# Altium PCB PCB2.PcbDoc
Units mm, origin at the board's own origin, x right, y up, seen from the top; angles counter-clockwise.
Board outline 152.4 x 101.6 mm, 2 copper layers (Top Layer, Bottom Layer); 79 components, 54 nets, 208 pads, 0 vias.
Unrouted connection lines stored in the file: 95.
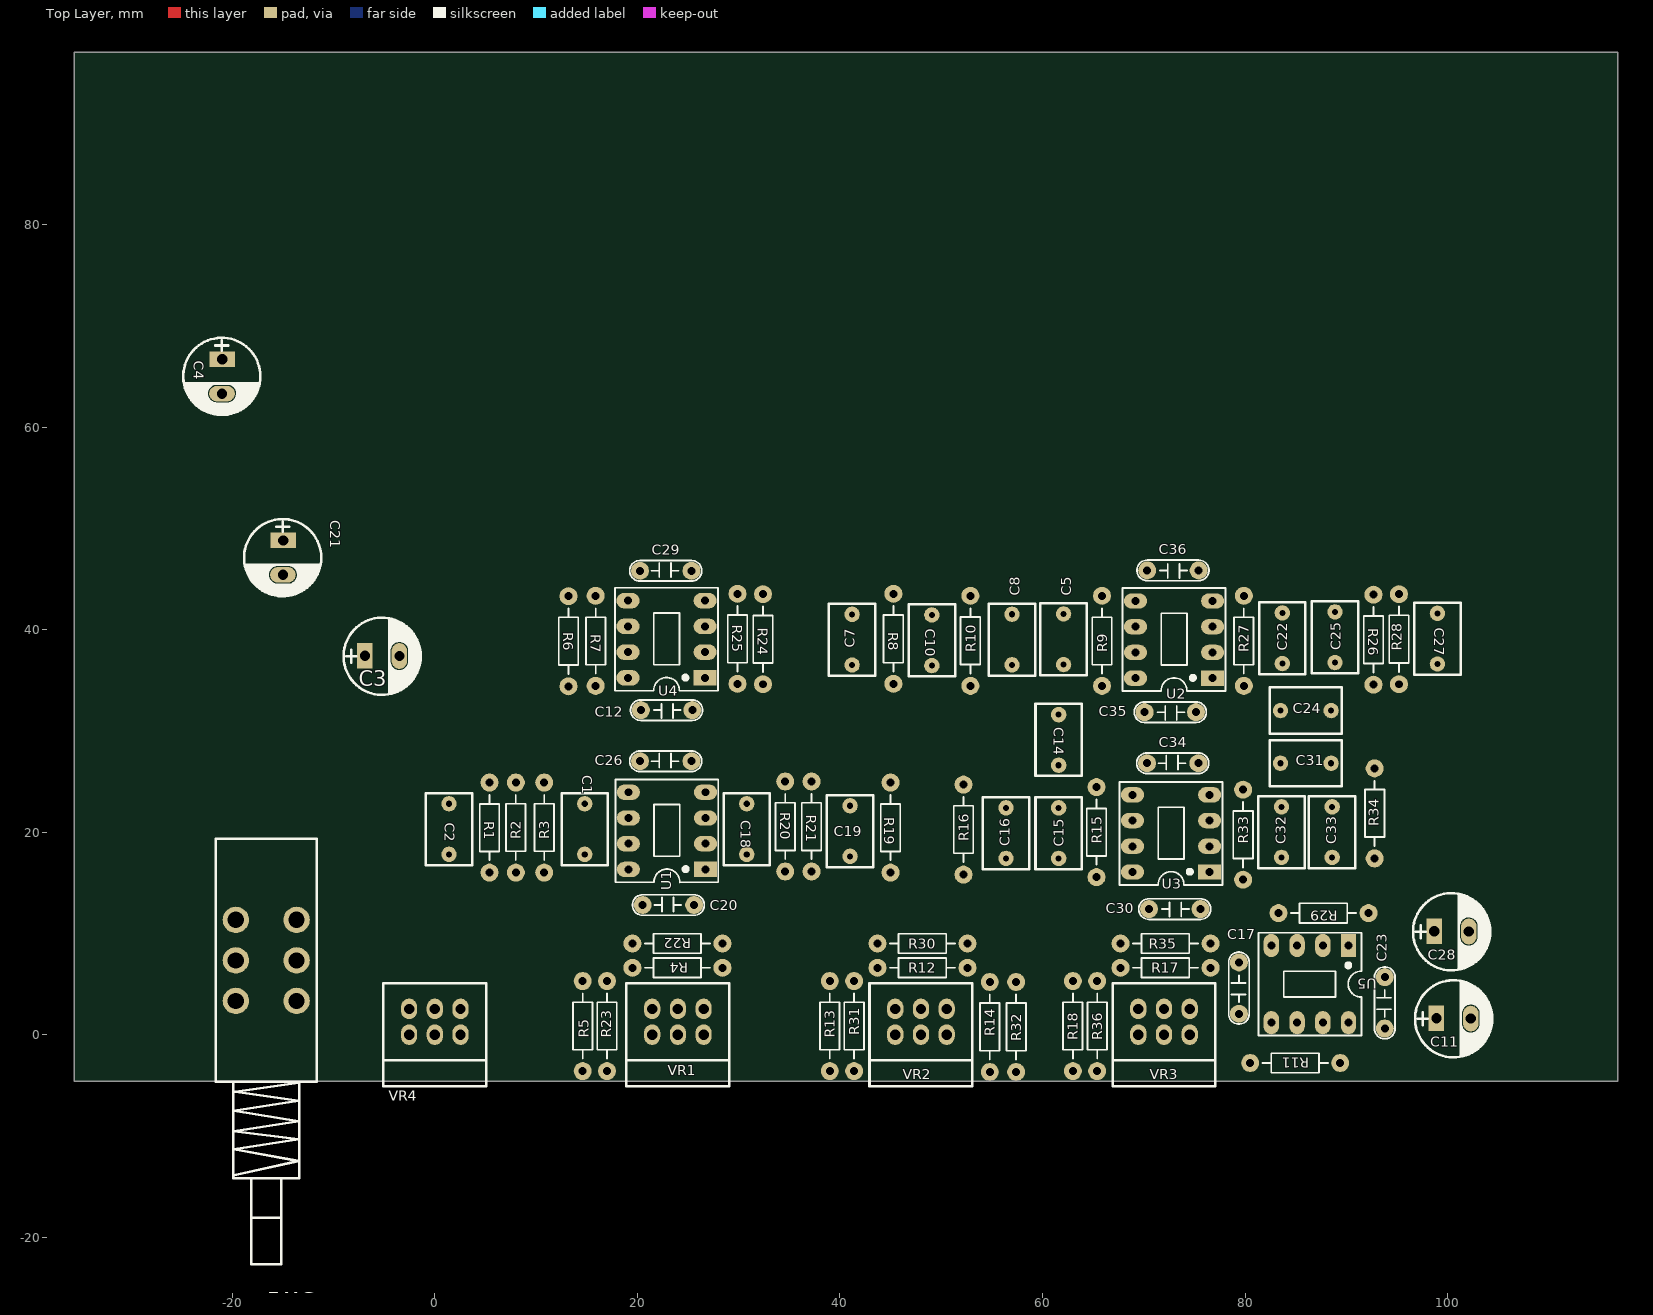
[diagram p0: Top Layer view]
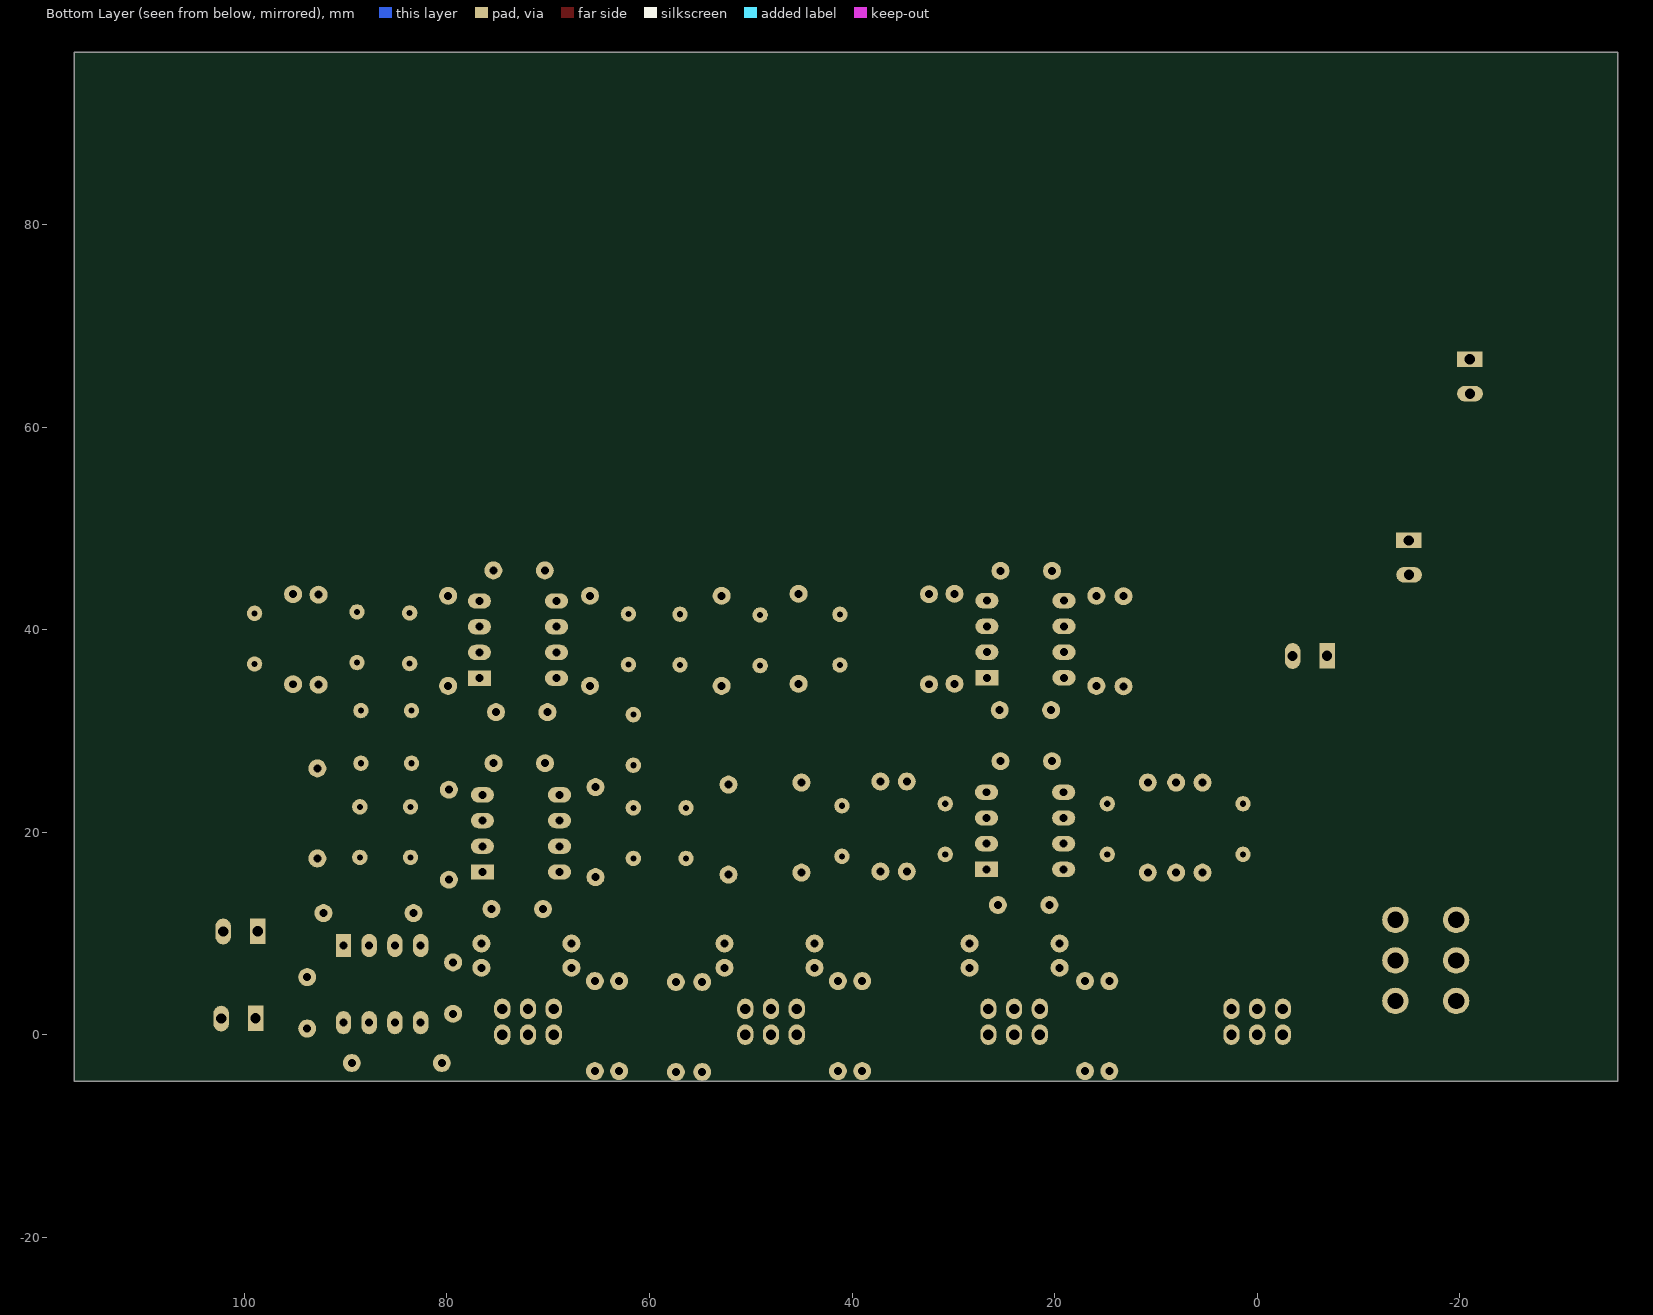
[diagram p1: Bottom Layer view, seen from below]

## Layer stack, top to bottom
Top Solder: solder mask 0.0102, Solder Resist, Dk 3.5
Top Layer: signal copper 0.0356
Dielectric 1: dielectric 0.32, FR-4, Dk 4.8
Bottom Layer: signal copper 0.0356
Bottom Solder: solder mask 0.0102, Solder Resist, Dk 3.5

## Board outline
-35.6,-4.6 116.8,-4.6 116.8,97 -35.6,97

## Design rules (kind name [scope] priority, off if disabled: settings)
Clearance [All] p1: gap=0.254
PolygonConnect [All] p1: connectstyle=Relief reliefconductorwidth=0.254 reliefentries=4 polygonreliefangle="90 Angle" airgapwidth=0.254
RoutingVias [All] p1: holewidth=0.711 width=1.27 viastyle="Through Hole" minholewidth=0.711 minwidth=1.27 maxholewidth=0.711 maxwidth=1.27
SolderMaskExpansion [All] p1: expansion=0.102
Width [All] p1: maxlimit=0.254 minlimit=0.254 preferedwidth=0.254
30 further rules are at their usual default settings.

## Components (designator, comment, footprint, x,y, rotation, side; value= is the part's Value field where it differs from the comment)
C1 "562" WIMA-FKP-2-1nF 14.8,20.301 r270 top
C2 "223" WIMA-FKP-2-1nF 1.4,20.299 r270 top
C3 "1uF" CP1/3.0 -5.2,37.4 r0 top
C4 "1uF" CP1/3.0 -21,65 r270 top
C5 "102" WIMA-FKP-2-1nF 62.082,39.042 r90 top
C7 "103" WIMA-FKP-2-1nF 41.2,39 r90 top
C8 "152" WIMA-FKP-2-1nF 56.99,39.01 r90 top
C10 "152" WIMA-FKP-2-1nF 49.082,38.941 r270 top
C11 "10uF" CP1/3.0 100.6,1.6 r0 top
C12 "104" TU_GOM(104-->105pF) 22.882,32.042 r180 top
C14 "471" WIMA-FKP-2-1nF 61.6,29.099 r90 top
C15 "471" WIMA-FKP-2-1nF 61.6,19.901 r90 top
C16 "471" WIMA-FKP-2-1nF 56.4,19.901 r90 top
C17 "104" TU_GOM(104-->105pF) 79.4,4.6 r90 top
C18 "562" WIMA-FKP-2-1nF 30.8,20.301 r270 top
C19 "222" WIMA-FKP-2-1nF 41,20.101 r90 top
C20 "104" TU_GOM(104-->105pF) 23.06,12.8 r0 top
C21 "1uF" CP1/3.0 -14.987,47.102 r270 top
C22 "102" WIMA-FKP-2-1nF 83.682,39.141 r90 top
C23 "104" TU_GOM(104-->105pF) 93.8,3.14 r90 top
C24 "103" WIMA-FKP-2-1nF 86,32 r0 top
C25 "152" WIMA-FKP-2-1nF 88.882,39.242 r90 top
C26 "104" TU_GOM(104-->105pF) 22.8,27 r0 top
C27 "152" WIMA-FKP-2-1nF 99,39.099 r90 top
C28 "10uF" CP1/3.0 100.4,10.2 r0 top
C29 "104" TU_GOM(104-->105pF) 22.8,45.8 r0 top
C30 "104" TU_GOM(104-->105pF) 73.06,12.4 r180 top
C31 "471" WIMA-FKP-2-1nF 86,26.8 r180 top
C32 "471" WIMA-FKP-2-1nF 83.6,20 r90 top
C33 "471" WIMA-FKP-2-1nF 88.6,20 r90 top
C34 "104" TU_GOM(104-->105pF) 72.86,26.8 r0 top
C35 "104" TU_GOM(104-->105pF) 72.622,31.842 r180 top
C36 "104" TU_GOM(104-->105pF) 72.882,45.842 r180 top
R1 "47K" "TRO_VACH_ 1/4W" 5.4,24.89 r270 top
R2 "47K" "TRO_VACH_ 1/4W" 8,16 r90 top
R3 "47K" "TRO_VACH_ 1/4W" 10.8,16 r90 top
R4 "56K" "TRO_VACH_ 1/4W" 28.4,6.6 r180 top
R5 "100" "TRO_VACH_ 1/4W" 14.6,-3.6 r90 top
R6 "47K" "TRO_VACH_ 1/4W" 13.2,34.4 r90 top
R7 "47K" "TRO_VACH_ 1/4W" 15.882,43.332 r270 top
R8 "47K" "TRO_VACH_ 1/4W" 45.282,43.532 r270 top
R9 "220K" "TRO_VACH_ 1/4W" 65.882,43.332 r270 top
R10 "47K" "TRO_VACH_ 1/4W" 52.882,34.442 r90 top
R11 "560K" "TRO_VACH_ 1/4W" 89.4,-2.8 r180 top
R12 "47K" "TRO_VACH_ 1/4W" 52.6,6.6 r180 top
R13 "100" "TRO_VACH_ 1/4W" 39,-3.6 r90 top
R14 "22K" "TRO_VACH_ 1/4W" 54.8,-3.69 r90 top
R15 "220K" "TRO_VACH_ 1/4W" 65.332,24.442 r270 top
R16 "56K" "TRO_VACH_ 1/4W" 52.2,15.8 r90 top
R17 "56K" "TRO_VACH_ 1/4W" 76.6,6.6 r180 top
R18 "100" "TRO_VACH_ 1/4W" 63,-3.6 r90 top
R19 "47K" "TRO_VACH_ 1/4W" 45,24.89 r270 top
R20 "47K" "TRO_VACH_ 1/4W" 34.6,25 r270 top
R21 "47K" "TRO_VACH_ 1/4W" 37.2,25 r270 top
R22 "56K" "TRO_VACH_ 1/4W" 28.4,9 r180 top
R23 "100" "TRO_VACH_ 1/4W" 17,-3.6 r90 top
R24 "47K" "TRO_VACH_ 1/4W" 32.4,43.49 r270 top
R25 "47K" "TRO_VACH_ 1/4W" 29.882,43.532 r270 top
R26 "47K" "TRO_VACH_ 1/4W" 92.682,43.442 r270 top
R27 "220K" "TRO_VACH_ 1/4W" 79.882,43.332 r270 top
R28 "47K" "TRO_VACH_ 1/4W" 95.2,34.6 r90 top
R29 "560K" "TRO_VACH_ 1/4W" 92.2,12 r180 top
R30 "47K" "TRO_VACH_ 1/4W" 52.6,9 r180 top
R31 "100" "TRO_VACH_ 1/4W" 41.4,-3.6 r90 top
R32 "22K" "TRO_VACH_ 1/4W" 57.4,-3.69 r90 top
R33 "220K" "TRO_VACH_ 1/4W" 79.81,24.188 r270 top
R34 "56K" "TRO_VACH_ 1/4W" 92.8,17.4 r90 top
R35 "56K" "TRO_VACH_ 1/4W" 76.6,9 r180 top
R36 "100" "TRO_VACH_ 1/4W" 65.4,-3.6 r90 top
SW1 "SPUN190900" SW-DIP-P42X10 -16.6,7.4 r270 top
U1 "TL082ACP" DIP8 22.914,20.124 r90 top
U2 "TL082ACP" DIP8 72.99,39.01 r90 top
U3 "TL082ACP" DIP8 72.698,19.87 r90 top
U4 "TL082ACP" DIP8 22.882,39.042 r90 top
U5 "TL082ACP" DIP8 86.41,4.99 r180 top
VR1 "10k" 9011 21.46,0 r0 top
VR2 "10k" 9011 45.46,0 r0 top
VR3 "10k" 9011 69.46,0 r0 top
VR4 "10k" 9011 -2.54,0 r0 top

## Footprints (in the part's own frame and the unit in brackets; to place one, negate y for a bottom-side part, rotate by r counter-clockwise, add the part's x,y. Pads: shape width x height; smd on the part's side, far side on the other; paste and mask are expansions set on the pad)
9011 [mil]
  oval 62.99x80 hole 40: 1(0,0) 2(100,0) 3(200,0) 4(0,100) 5(100,100) 6(200,100)
  silkscreen extent -100,-200 300,200
CP1/3.0 [mil]
  rect 60x100 hole 40: 1(-67,0.5)
  oval 60x100 hole 40: 2(67,-0.5)
  silkscreen extent -150,-151 150,148, body extent -156,-161 159,154, height 453
DIP8 [mil]
  rect 60x90 hole 31: 1(-150,-150)
  oval 60x90 hole 31: 2(-50,-150) 3(50,-150) 4(150,-150) 5(150,150) 6(50,150) 7(-50,150) 8(-150,150)
  silkscreen extent -200,-200 200,200, body extent -200,-190 200,186, height 201
SW-DIP-P42X10 [mm]
  round 2.6 hole 1.6: 1(4.064,-3.048) 2(0.064,-3.048) 3(-3.936,-3.048) 4(4.064,2.952) 5(0.064,2.952) 6(-3.936,2.952)
  silkscreen extent -11.94,-5.05 30.06,4.95, body extent -9.92,-5.18 32.08,4.82, height 11.01
"TRO_VACH_ 1/4W" [mil] "R 1/4W, 2 Pin, 350mil"
  round 70 hole 31: 1(0,0) 2(350,0)
  silkscreen extent 48,-38 302,38, body extent -40,-47 386,47, height 111
TU_GOM(104-->105pF) [mil]
  round 70 hole 31: 1(-100,0) 2(100,0)
  silkscreen extent -140,-40 140,40, body extent -154,-44 160,55, height 407
WIMA-FKP-2-1nF [mil] "W=4.5"
  round 60 hole 23.62: 1(-98.4,0) 2(98.4,0)
  silkscreen extent -140,-90 140,90, body extent -142,-88 142,89, height 236

## Part data
C1 C2 C5 C7 C8 C10 C12 C14 C15 C16 C17 C18 C19 C20 C22 C23 C24 C25 C26 C27 C29 C30 C31 C32 C33 C34 C35 C36: library part "TU_MICA_ 104 100V(2A104J)_MH"
C3 C4 C11 C21 C28: library part TU_HOA_4.7uF_100V_MH, "TU_HOA_4.7uF_100V_MH"
R1 R2 R3 R4 R5 R6 R7 R8 R9 R10 R11 R12 R13 R14 R15 R16 R17 R18 R19 R20 R21 R22 R23 R24 R25 R26 R27 R28 R29 R30 R31 R32 R33 R34 R35 R36: library part TRO_VACH_1/2W_MH, "Resistor"
U1 U2 U3 U4 U5: "JFET-Input Operational Amplifier"
VR1 VR2 VR3 VR4: library part "Triet Ap Doi 10k_MH", "Triet Ap Doi 10k"

## Nets (pads, with @x,y where several pads share a name; then routed paths per layer and width w, separated by ;. In a path a pad name is that pad's centre, name@x,y a point inside that pad or via, vN(x,y) a via of type N, cw(c..) or ccw(c..) an arc to the next point about the centre after c; other vN are vias at no path point)
+15V: C12.2 C20.1 C23.2 C30.2 C35.2 U1.8 U2.8 U3.8 U4.8 U5.8
-15V: C17.2 C26.2 C29.2 C34.2 C36.1 U1.4 U2.4 U3.4 U4.4 U5.4
GND: C2.1 C10.2 C12.1 C17.1 C19.1 C20.2 C23.1 C26.1 C27.2 C29.1 C30.1 C34.1 C35.1 C36.2 R5.1 R13.1 R14.1 R16.1 R18.1 R23.1 R31.1 R32.1 R34.1 R36.1 U1.3 U1.5 U2.3 U2.5 U3.3 U3.5 U4.3 U4.5 VR4.1
IN_L: C4.1 C21.1 VR4.2
IN_L_PRE: C3.1
NetC1_1: C1.1 R3.2 U1.6
NetC1_2: C1.2 R2.2 U1.7 VR1.3
NetC2_2: C2.2 R1.2 R2.1 R3.1
NetC3_2: C3.2 VR4.3
NetC4_2: C4.2 R6.1
NetC5_1: C5.1 R9.2 U2.7 VR2.3
NetC5_2: C5.2 C8.2 R10.1
NetC7_1: C7.1 C14.2 R1.1 R7.2 U4.7
NetC7_2: C7.2 R8.2
NetC8_1: C8.1 R9.1 U2.6
NetC10_1: C10.1 R8.1 R10.2
NetC11_1: C11.1 R11.1 U5.7
NetC14_1: C14.1 C15.2 C16.2 R16.2
NetC15_1: C15.1 R15.2 U3.7 VR3.3
NetC16_1: C16.1 R15.1 U3.6
NetC18_1: C18.1 R21.2 U1.2
NetC18_2: C18.2 R20.2 U1.1 VR1.6
NetC19_2: C19.2 R19.2 R20.1 R21.1
NetC21_2: C21.2 R24.1
NetC22_1: C22.1 R27.2 U2.1 VR2.6
NetC22_2: C22.2 C25.2 R26.1 R28.2
NetC24_1: C24.1 C31.2 R19.1 R25.2 U4.1
NetC24_2: C24.2 R26.2
NetC25_1: C25.1 R27.1 U2.2
NetC27_1: C27.1 R28.1
NetC28_1: C28.1 R29.1 U5.1
NetC31_1: C31.1 C32.2 C33.2 R34.2
NetC32_1: C32.1 R33.2 U3.1 VR3.6
NetC33_1: C33.1 R33.1 U3.2
NetR4_1: R4.1 R11.2 R17.1 U5.6
NetR4_2: R4.2 VR1.2
NetR5_2: R5.2 VR1.1
NetR6_2: R6.2 R7.1 U4.6
NetR12_1: R12.1 R14.2 U5.5
NetR12_2: R12.2 VR2.2
NetR13_2: R13.2 VR2.1
NetR17_2: R17.2 VR3.2
NetR18_2: R18.2 VR3.1
NetR22_1: R22.1 R29.2 R35.1 U5.2
NetR22_2: R22.2 VR1.5
NetR23_2: R23.2 VR1.4
NetR24_2: R24.2 R25.1 U4.2
NetR30_1: R30.1 R32.2 U5.3
NetR30_2: R30.2 VR2.5
NetR31_2: R31.2 VR2.4
NetR35_2: R35.2 VR3.5
NetR36_2: R36.2 VR3.4
OUT_L: C11.2
OUT_R: C28.2
pads on no net: SW1.1 SW1.2 SW1.3 SW1.4 SW1.5 SW1.6 VR4.4 VR4.5 VR4.6